# EAGLE board redmaus-ir-tx-amp-mk-1.1 (EAGLE 7.5.0)
VERSION: v1.1
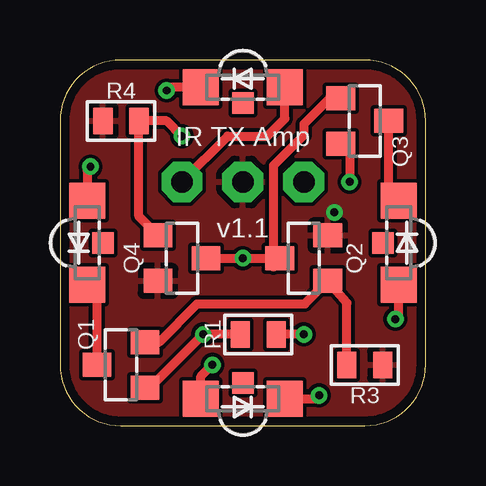
[diagram p0: board, top side]
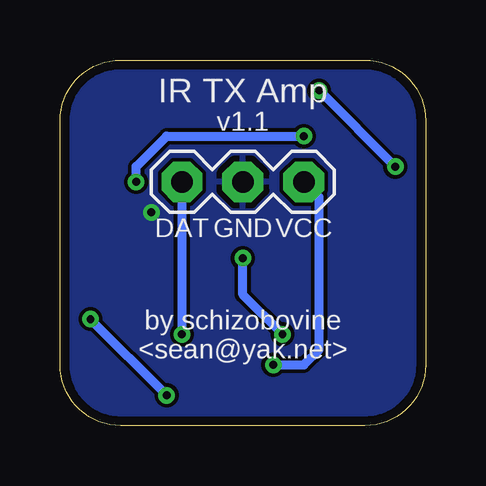
[diagram p1: board, bottom side, seen from below]

Size 15.24 x 15.24 mm. Coordinates in mm from the lower left corner, seen from the top.
Outline: 0,12.7 0,2.54 arc90 2.54,0 12.7,0 arc90 15.24,2.54 15.24,12.7 arc90 12.7,15.24 2.54,15.24 arc90 0,12.7
Copper layers (1*16): Top 0.0356mm / dielectric 1.5011mm / Bottom 0.0356mm
Design rules "LaenPCBOrder2": minimum track width 6mil, minimum drill 13mil, track to track 6mil, track to pad 6mil, pad to pad 6mil, via to via 6mil, smd to smd 6mil, copper to edge 15mil, drill to drill 6mil, minimum pad ring 7mil, minimum via ring 7mil, stop-mask expansion 3mil, vias tented up to drill 20mil, thermal gap 10mil

## Footprints (pad centres in the part's own frame; a part is rotated, then mirrored left to right if it is on the bottom)
1X03-CENTERED = drill 0.9 pad 1.7 octagon: 1 -2.54,0; 2 0,0; 3 2.54,0
LED-3MMX2MM-SIDE-SMD = smd 1.5 x 1.5: A -0.5,-1.75; K -0.5,1.75 | smd 0.9 x 0.9: P$1 -1.15,0
SOT23 = smd 1 x 1.2: 1 -0.95,-1; 2 0.95,-1; 3 0,1
R0603-TIGHTER = smd 0.8 x 1.1: 1 -0.75,0; 2 0.75,0

## Placement (x,y rotation side)
FRAME1  FRAME-LETTERNO_PACKAGE  [DUMMY]  0,0 0 top
JP1  M03PTH-CENTERED  [1X03-CENTERED]  7.62,10.16 0 bottom
LED1  LED3MMX2MM-SIDE-SMD  [LED-3MMX2MM-SIDE-SMD]  0.64,7.62 180 top
LED2  LED3MMX2MM-SIDE-SMD  [LED-3MMX2MM-SIDE-SMD]  7.62,14.61 90 top
LED3  LED3MMX2MM-SIDE-SMD  [LED-3MMX2MM-SIDE-SMD]  14.61,7.62 0 top
LED4  LED3MMX2MM-SIDE-SMD  [LED-3MMX2MM-SIDE-SMD]  7.62,0.64 270 top
Q1  MMBT2222A  [SOT23]  2.54,2.54 90 top
Q2  MMBT2222A  [SOT23]  10.16,6.99 90 top
Q3  MMBT2222A  [SOT23]  12.7,12.7 270 top
Q4  MMBT2222A  [SOT23]  5.08,6.99 270 top
R1  470R  [R0603-TIGHTER]  8.26,3.81 180 top
R3  10R  [R0603-TIGHTER]  12.7,2.54 180 top
R4  10R  [R0603-TIGHTER]  2.54,12.7 0 top

## Library data of the parts
FRAME1 = a_parts; DESIGNER: Nobody; VERSION: v1.0.0
JP1 LED1-LED4 Q1-Q4 R1 R3 R4 = a_parts

## Nets
DATA: JP1.1 R1.1
DATA-AMP: Q1.1 Q2.3 Q3.1 Q4.3 R1.2
GND: JP1.2 Q2.2 Q4.2 R3.1 R4.1
N$1: LED1.A LED2.K
N$2: LED3.K Q3.3
N$3: LED1.K Q1.3
N$4: Q1.2 Q2.1 R3.2
N$5: Q3.2 Q4.1 R4.2
N$6: LED3.A LED4.K
VCC: JP1.3 LED2.A LED4.A

## Tracks (layer width: path | path; a pad name or v marks a point on that pad's centre or on a via)
DATA  (via drill 0.33)
  Top 0.381: v10.16,3.81 R1.1
  Bottom 0.381: JP1.1 v10.16,3.81
DATA-AMP  (via drill 0.33)
  Top 0.381: Q3.1 11.24,13.65 10.16,12.57 10.16,12.11 8.89,10.84 8.89,6.62 Q2.3 v7.62,6.99 Q4.3 | R1.2 v5.97,3.81 | v5.97,3.81 5.89,3.81 | Q1.1 3.75,1.59 v5.97,3.81
  Bottom 0.381: v5.97,3.81 7.62,5.46 v7.62,6.99
GND  (via drill 0.33)
  other vias: 11.43,8.89
  pour Top (rank 6): 0,12.7 0,2.54 arc90 2.54,0 12.7,0 arc90 15.24,2.54 15.24,12.7 arc90 12.7,15.24 2.54,15.24 arc90
  pour Bottom (rank 6): 15.24,12.7 15.24,2.54 arc-90 12.7,0 2.54,0 arc-90 0,2.54 0,12.7 arc-90 2.54,15.24 12.7,15.24 arc-90
N$1  (via drill 0.33)
  Top 0.381: LED2.K 4.58,14.11 v4.45,13.97 | v1.27,10.79 1.14,10.66 LED1.A
  Bottom 0.381: v4.45,13.97 v1.27,10.79
N$2
  Top 0.381: LED3.K 13.7,9.78 Q3.3
N$3
  Top 0.381: LED1.K 1.54,5.46 Q1.3
N$4
  Top 0.381: Q1.2 4.12,3.49 5.71,5.08 10.21,5.08 Q2.1 11.95,5.12 R3.2
N$5  (via drill 0.33)
  Top 0.381: Q3.2 12.06,11.38 v12.06,10.16 | v5.08,12.06 4.45,12.7 R4.2 3.29,8.72 Q4.1
  Bottom 0.381: v12.06,10.16 12.06,10.79 10.79,12.06 v5.08,12.06
N$6  (via drill 0.33)
  Top 0.381: LED4.K 10.66,1.14 v10.79,1.27 | v13.97,4.45 14.11,4.58 LED3.A
  Bottom 0.381: v10.79,1.27 v13.97,4.45
VCC  (via drill 0.33)
  Top 0.381: JP1.3 6.99,12.06 8.64,12.06 9.37,12.8 LED2.A | LED4.A 5.87,2.06 v6.35,2.54
  Bottom 0.381: v6.35,2.54 5.08,2.54 4.45,3.17 4.45,9.53 JP1.3

## Text on the board
tPlace: IR TX Amp
bPlace: IR TX Amp | VCC | GND | DAT | by schizobovine / <sean@yak.net>